# Altium PCB FPC test - flex side.PcbDoc
Units mm, origin at the board's own origin, x right, y up, seen from the top; angles counter-clockwise.
Board outline 21 x 6.5 mm, 2 copper layers (Top Layer, Bottom Layer), stack 0.172 mm thick; 1 components, 10 nets, 20 pads, 1 vias.
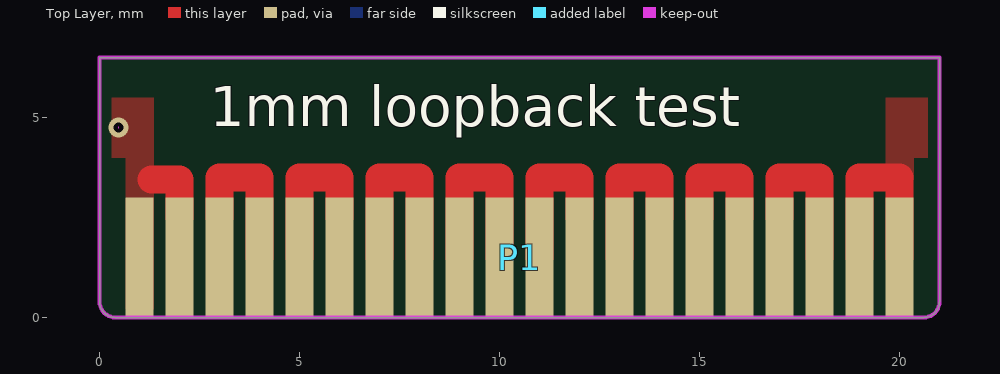
[diagram p0: Top Layer view]
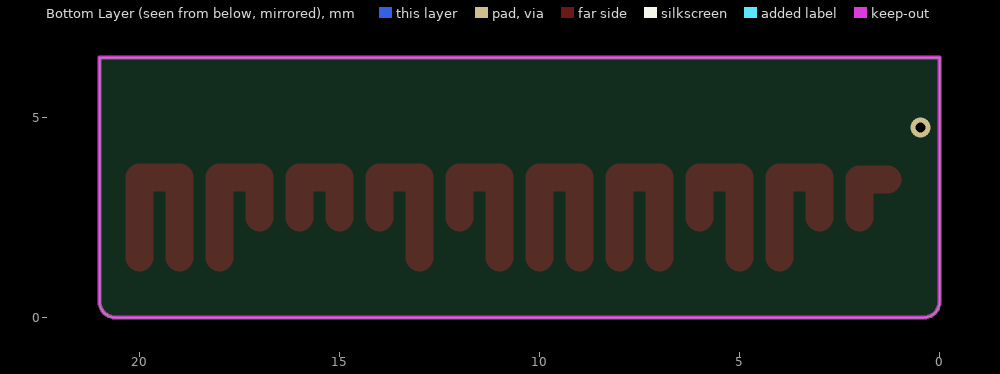
[diagram p1: Bottom Layer view, seen from below]

## Layer stack, top to bottom
Top Solder: solder mask 0.0254, SM-001, Dk 4
Top Layer: signal copper 0.035
Dielectric 1: core 0.1016, Core-043, Dk 3.2
Bottom Layer: signal copper 0.035
Bottom Solder: solder mask 0.0254, SM-001, Dk 4

## Board outline
0,0.4 ccw(c0.4,0.4) 0.4,0 20.6,0 ccw(c20.6,0.4) 21,0.4 21,6.5 0,6.5

## Design rules (kind name [scope] priority, off if disabled: settings)
Clearance [All] p1: gap=0.152 ignorepadtopadclearanceinfootprint=FALSE
PolygonConnect [All] p1: connectstyle=Direct reliefconductorwidth=0.254 reliefentries=4 polygonreliefangle="90 Angle" airgapwidth=0.254
RoutingVias [All] p1: holewidth=0.711 width=1.27 viastyle="Through Hole" minholewidth=0.254 minwidth=0.508 maxholewidth=0.711 maxwidth=1.27
SolderMaskExpansion SolderMaskExpansion_Vias [IsVia] p1: expansion=0.102 istentingtop=TRUE
SolderMaskExpansion [All] p2: expansion=0.102 istentingtop=FALSE
Width [All] p1: maxlimit=0.7 minlimit=0.5 preferedwidth=0.7
30 further rules are at their usual default settings.

## Components (designator, comment, footprint, x,y, rotation, side; value= is the part's Value field where it differs from the comment)
P1 "Header 20" "FLEX TAB 20P 1MM PITCH" 1,1.5 r0 top

## Footprints (in the part's own frame and the unit in brackets; to place one, negate y for a bottom-side part, rotate by r counter-clockwise, add the part's x,y. Pads: shape width x height; smd on the part's side, far side on the other; paste and mask are expansions set on the pad)
"FLEX TAB 20P 1MM PITCH" [mm] "quick and dirty flex-pcb connector tab.  not vetted or tested in any meaningful way."
  rect 0.7x3 smd mask+0: 1(0,0) 2(1,0) 3(2,0) 4(3,0) 5(4,0) 6(5,0) 7(6,0) 8(7,0) 9(8,0) 10(9,0) 11(10,0) 12(11,0) 13(12,0) 14(13,0) 15(14,0) 16(15,0) 17(16,0) 18(17,0) 19(18,0) 20(19,0)

## Part data
P1: "Header, 20-Pin", LatestRevisionDate=17-Jul-2002, LatestRevisionNote="Re-released for DXP Platform.", Publisher="Altium Limited"

## Via types
v1: diameter 0.508, hole 0.254, Top Layer to Bottom Layer, tented both sides, 1 vias

## Nets (pads, with @x,y where several pads share a name; then routed paths per layer and width w, separated by ;. In a path a pad name is that pad's centre, name@x,y a point inside that pad or via, vN(x,y) a via of type N, cw(c..) or ccw(c..) an arc to the next point about the centre after c; other vN are vias at no path point)
NetP1_1: P1.1 P1.2 | length 1.7
  Top Layer w0.7: 1.3,3.45 2,3.45 P1.2@2,2.5
  other v1: 0.475,4.75
NetP1_3: P1.3 P1.4 | length 4
  Top Layer w0.7: P1.3@3,2.5 3,3.5 4,3.5 P1.4
NetP1_5: P1.5 P1.6 | length 4
  Top Layer w0.7: P1.5 5,3.5 6,3.5 P1.6@6,2.5
NetP1_7: P1.7 P1.8 | length 5
  Top Layer w0.7: P1.7 7,3.5 8,3.5 P1.8
NetP1_9: P1.9 P1.10 | length 5
  Top Layer w0.7: P1.9 9,3.5 10,3.5 P1.10
NetP1_11: P1.11 P1.12 | length 4
  Top Layer w0.7: P1.11 11,3.5 12,3.5 P1.12@12,2.5
NetP1_13: P1.13 P1.14 | length 4
  Top Layer w0.7: P1.13 13,3.5 14,3.5 P1.14@14,2.5
NetP1_15: P1.15 P1.16 | length 3
  Top Layer w0.7: P1.15@15,2.5 15,3.5 16,3.5 P1.16@16,2.5
NetP1_17: P1.17 P1.18 | length 4
  Top Layer w0.7: P1.17@17,2.5 17,3.5 18,3.5 P1.18
NetP1_19: P1.19 P1.20 | length 5
  Top Layer w0.7: P1.19 19,3.5 20,3.5 P1.20

## Polygon pours and split planes (outlines as drawn)
NetP1_19 on Top Layer "NETP1_19_L01_P001" (solid, pour order 1): 20.35,3.45 20.35,4 20.7,4 20.7,5.5 19.65,5.5 19.65,3.55 19.75,3.45
NetP1_1 on Top Layer "NETP1_1_L01_P000" (solid, pour order 0): 0.65,0 0.65,4 0.3,4 0.3,5.5 1.35,5.5 1.35,0

## Keep-outs
Top Layer:
  circle w0.03: c0.475,4.75 r0.01
Keep-Out Layer:
  the board outline again, w0.1

## Other copper
Top Layer:
  region: 0.65,3.15

## Silkscreen, mask and mechanical layers (free items; w line width, h text height)
Top Overlay:
  text "1mm loopback test" at 2.75,4.783 h1